# Altium PCB Manchester-Comparator_Module.PcbDoc
Units mm, origin at the board's own origin, x right, y up, seen from the top; angles counter-clockwise.
Board outline 105 x 60 mm, 2 copper layers (Top Layer, Bottom Layer); 23 components, 26 nets, 102 pads, 0 vias.
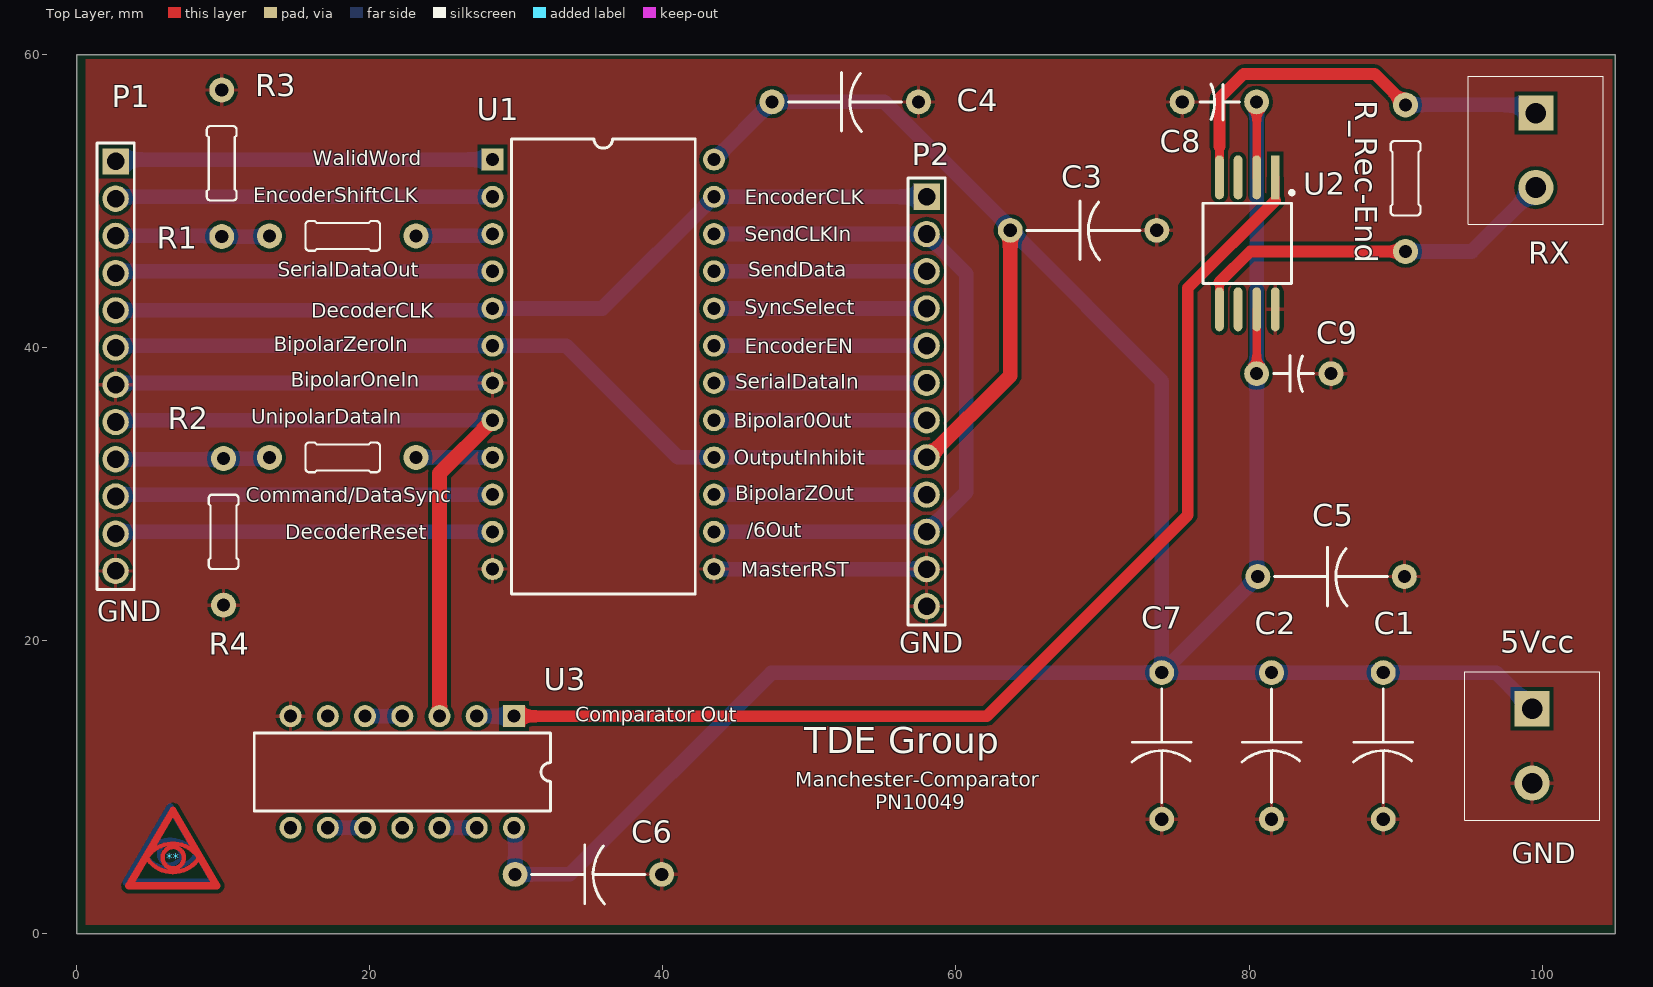
[diagram p0: Top Layer view]
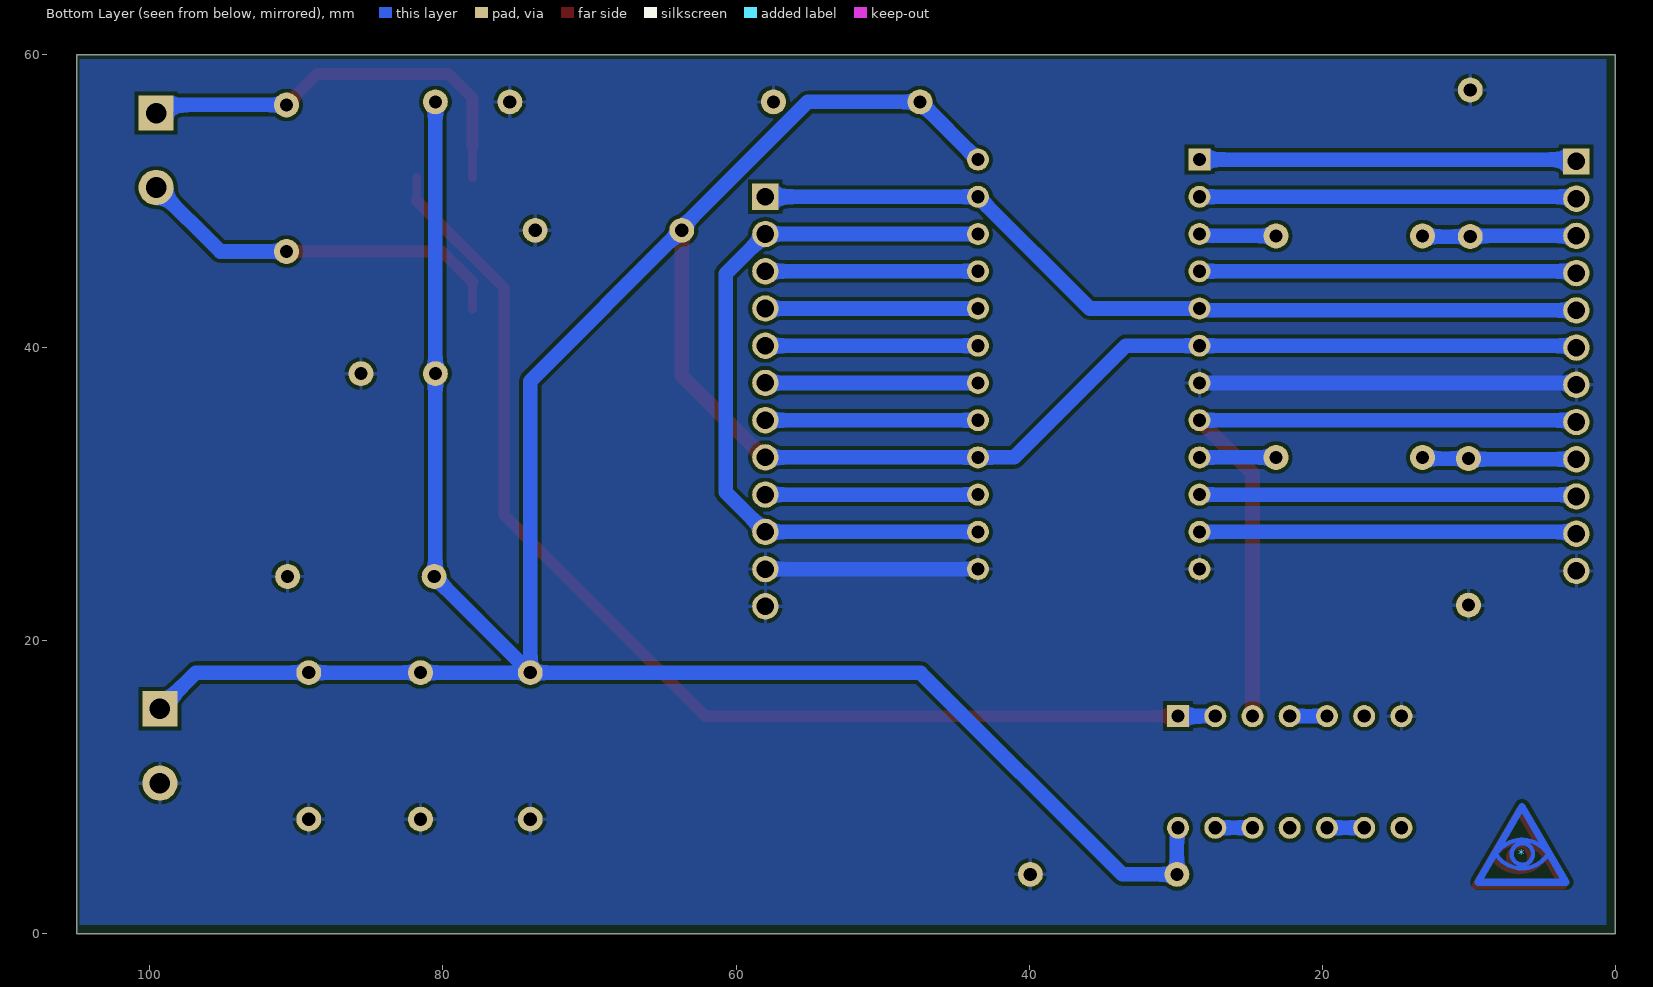
[diagram p1: Bottom Layer view, seen from below]

## Layer stack, top to bottom
Top Solder: solder mask 0.0102, Solder Resist, Dk 3.5
Top Layer: signal copper 0.0356
Dielectric 1: dielectric 0.32, FR-4, Dk 4.8
Bottom Layer: signal copper 0.0356
Bottom Solder: solder mask 0.0102, Solder Resist, Dk 3.5

## Board outline
0,0 0,60 105,60 105,0

## Design rules (kind name [scope] priority, off if disabled: settings)
Clearance Polygons [InPolygon] p1: gap=0.254
Clearance [All] p2: gap=0.15
MinimumSolderMaskSliver [All] p1: minsoldermaskwidth=0.1
PolygonConnect [All] p1: connectstyle=Relief reliefconductorwidth=0.254 reliefentries=4 polygonreliefangle="90 Angle" airgapwidth=0.254
RoomDefinition Manchester-Comparator_Module [InComponentClass('Manchester-Comparator_Module')] p1: confinementstyle=ConfineIn formatcopy=TRUE lockcomponents=FALSE outline -3.683,-6.35 111.887,-6.35 111.887,62.865 -3.683,62.865
RoutingVias [All] p1: holewidth=0.711 width=1.27 viastyle="Through Hole" minholewidth=0 minwidth=0 maxholewidth=0.711 maxwidth=1.27
SilkToSilkClearance [All] p1: silktosilkclearance=0
SilkToSolderMaskClearance [IsPad] p1: minsilkscreentomaskgap=0.1 clearancetoexposedcopper=TRUE
SolderMaskExpansion [All] p1: expansion=0.102
Width [All] p1: maxlimit=4 minlimit=0.254 preferedwidth=0.5
27 further rules are at their usual default settings.

## Components (designator, comment, footprint, x,y, rotation, side; value= is the part's Value field where it differs from the comment)
5Vcc "PHOENIX_1715721" Phoenix-2-5_08 99.314,12.827 r270 top
* "Eye" Eye 6.35,5.461 r180 bottom
** "Eye" Eye 6.604,5.207 r0 top
C1 "Capacitor-Dummy-THT" Dummy-10mm 89.154,12.827 r270 top
C2 "Capacitor-Dummy-THT" Dummy-10mm 81.534,12.827 r270 top
C3 "Capacitor-Dummy-THT" Dummy-10mm 68.707,48.006 r0 top
C4 "Capacitor-Dummy-THT" Dummy-10mm 52.451,56.769 r0 top
C5 "Capacitor-Dummy-THT" Dummy-10mm 85.598,24.384 r0 top
C6 "Capacitor-Dummy-THT" Dummy-10mm 34.925,4.064 r0 top
C7 "Capacitor-Dummy-THT" Dummy-10mm 74.041,12.827 r270 top
C8 "100nF_50V_THT_HT" KEMET-C052H 77.978,56.769 r180 top
C9 "100nF_50V_THT_HT" KEMET-C052H 83.058,38.227 r0 top
P1 "Plug_12_2.54" HDR1X12_2.54 2.667,38.735 r270 top
P2 "Plug_12_2.54" HDR1X12_2.54 58,36.322 r270 top
R1 "10k_10mm-HT" Dummy-10mm 18.161,47.625 r180 top
R2 "10k_10mm-HT" Dummy-10mm 18.161,32.512 r180 top
R3 "20k_10mm-HT" Dummy-10mm 9.906,52.578 r270 top
R4 "20k_10mm-HT" Dummy-10mm 10.033,27.432 r90 top
R_Rec-End "Resistor-Dummy-THT" Dummy-10mm 90.678,51.562 r90 top
RX "PHOENIX_1715721" Phoenix-2-5_08 99.568,53.467 r270 top
U1 "HI15530CD" DIP-24-Ceramic-HT 35.941,38.862 r270 top
U2 "HMXCMP01DEN" Honeywell-SO8 79.883,47.117 r180 top
U3 "SN7400N" DIP-14 22.225,11.049 r180 top

## Footprints (in the part's own frame and the unit in brackets; to place one, negate y for a bottom-side part, rotate by r counter-clockwise, add the part's x,y. Pads: shape width x height; smd on the part's side, far side on the other; paste and mask are expansions set on the pad)
DIP-14 [mm] "DIP; 14 Leads; Row Spacing 7.62 mm; Pitch 2.54 mm"
  rect 1.5x1.5 hole 0.9: 1(-7.62,-3.81)
  round 1.5 hole 0.9: 2(-5.08,-3.81) 3(-2.54,-3.81) 4(0,-3.81) 5(2.54,-3.81) 6(5.08,-3.81) 7(7.62,-3.81) 8(7.62,3.81) 9(5.08,3.81) 10(2.54,3.81) 11(0,3.81) 12(-2.54,3.81) 13(-5.08,3.81) 14(-7.62,3.81)
  silkscreen extent -10.1,-2.65 10.1,2.65, body extent -10.02,-2.6 10.09,2.7, height 3
DIP-24-Ceramic-HT [mm] "DIP; 24 Leads; Row Spacing 7.62 mm; Pitch 2.54 mm"
  rect 1.5x1.5 hole 0.9: 1(-13.97,-7.555)
  round 1.5 hole 0.9: 2(-11.43,-7.555) 3(-8.89,-7.555) 4(-6.35,-7.555) 5(-3.81,-7.555) 6(-1.27,-7.555) 7(1.27,-7.555) 8(3.81,-7.555) 9(6.35,-7.555) 10(8.89,-7.555) 11(11.43,-7.555) 12(13.97,-7.555) 13(13.97,7.555) 14(11.43,7.555) 15(8.89,7.555) 16(6.35,7.555) 17(3.81,7.555) 18(1.27,7.555) 19(-1.27,7.555) 20(-3.81,7.555) 21(-6.35,7.555) 22(-8.89,7.555) 23(-11.43,7.555) 24(-13.97,7.555)
  silkscreen extent -15.38,-6.27 15.68,6.28, body extent -15.38,-6.27 15.7,6.28, height 3
Dummy-10mm [mm] "Dummy-10mm"
  round 1.7 hole 0.9: 1(-5,0) 2(5,0)
  silkscreen extent -3.88,-2.01 3.85,2, body extent -2.39,-0.88 2.41,0.88, height 1.87
Eye [mm]
  Top Layer circle w0.3: c-0.005,-0.005 r0.728
  Top Layer lines w0.3: 1.792,0.042 cw(c-0.03,1.138) -1.862,0.058 ; 1.74,0.007 ccw(c-0.03,-1.17) -1.796,0.014
  Top Layer lines w0.5: 2.97,-1.93 -0.025,3.225 -3.03,-1.93 2.97,-1.93
HDR1X12_2.54 [mm] "Connector; Header; 11 Position"
  rect 1.8x1.8 hole 1.2: 1(-13.97,0)
  round 1.8 hole 1.2: 2(-11.43,0) 3(-8.89,0) 4(-6.35,0) 5(-3.81,0) 6(-1.27,0) 7(1.27,0) 8(3.81,0) 9(6.35,0) 10(8.89,0) 11(11.43,0) 12(13.97,0)
  silkscreen extent -15.24,-1.27 15.24,1.27, body extent -15.21,-1.27 15.27,1.27, height 8.62
Honeywell-SO8 [mm] "Honeywell-SO8"
  rect 0.6x3 smd: 1(-1.905,-4.5)
  oval 0.6x3 smd: 2(-0.635,-4.5) 3(0.635,-4.5) 4(1.905,-4.5) 5(1.905,4.5) 6(0.635,4.5) 7(-0.635,4.5) 8(-1.905,4.5)
  silkscreen extent -3.16,-3.58 3.02,2.75, body extent -3.04,-3.2 3,3.21, height 3
KEMET-C052H [mm] "KEMET, C052H/C062 Series, THT"
  round 1.7 hole 0.9: 1(-2.54,0) 2(2.54,0)
  silkscreen extent -1.38,-1.21 1.33,1.22, body extent -3.7,-1.33 3.7,1.3, height 8
Phoenix-2-5_08 [mm] "Phoenix, 1715721"
  rect 2.4x2.4 hole 1.4: 1(-2.54,0)
  round 2.4 hole 1.4: 2(2.54,0)
  silkscreen extent -5.06,-4.6 5.06,4.6, body extent -5.05,-5.19 5.85,4.61, height 14.2

## Part data
5Vcc RX: library part 2Pol_1715721, "Phoenix, 2 pol, 5.08mm, 22A, 715721"
C8 C9: "High Temp C series, NP0, 10%, 50V"
P1 P2: "Plug, 11-Pin"
R1 R2 R3 R4: "RN60 Series, 1%, 175°C"
U1: "Manchester Encoder / Decoder"
U2: "HiTemp Comparator"
U3: "Quad NAND, TTL"

## Nets (pads, with @x,y where several pads share a name; then routed paths per layer and width w, separated by ;. In a path a pad name is that pad's centre, name@x,y a point inside that pad or via, vN(x,y) a via of type N, cw(c..) or ccw(c..) an arc to the next point about the centre after c; other vN are vias at no path point)
5V: 5Vcc.1 C1.1 C2.1 C3.1 C4.1 C5.1 C6.1 C7.1 C8.1 C9.1 P1.6 P2.8 U1.6 U1.16 U1.24 U2.2 U2.7 U3.14 | length 267
  Top Layer w0.6: C9.1 U2.7 ; U2.2 C8.1
  Top Layer w1: P2.8@58.127,32.512 63.707,38.092 C3.1@63.707,48.18
  Bottom Layer w0.6: U3.14 U3.14@29.925,7.159
  Bottom Layer w1: P1.6 2.794,40.132 U1.6 33.401,40.132 41.021,32.512 U1.16 P2.8@58.127,32.512 ; U3.14@29.925,7.159 C6.1 33.655,4.064 47.418,17.827 C7.1 ; U1.24 43.514,52.832 C4.1 55.118,56.769 C3.1@63.707,48.18 ; C3.1@63.73,48.03 74.041,37.719 C7.1 ; C8.1 C9.1 80.518,24.304 C7.1 ; 5Vcc.1 96.854,17.827 C1.1 C2.1 C7.1
GND: 5Vcc.2 C1.2 C2.2 C3.2 C4.2 C5.2 C6.2 C7.2 C8.2 C9.2 P1.7 P1.12 P2.11 P2.12 R3.1 R4.1 U1.7 U1.12 U1.13 U2.8 U3.7 | length 40.3
  Bottom Layer w1: P1.7 2.794,37.592 U1.7 ; U1.13 P2.11
NetP1_1: P1.1 U1.1 | length 25.6
  Bottom Layer w1: P1.1@2.794,52.832 U1.1
NetP1_2: P1.2 U1.2 | length 25.6
  Bottom Layer w1: P1.2@2.794,50.292 U1.2
NetP1_3: P1.3 R1.2 R3.2 | length 10.5
  Bottom Layer w1: P1.3 R3.2@9.906,47.625 ; R3.2 13.114,47.578 R1.2
NetP1_4: P1.4 U1.4 | length 25.6
  Bottom Layer w1: P1.4@2.794,45.212 U1.4
NetP1_5: P1.5 P2.1 U1.5 U1.23 | length 58.5
  Bottom Layer w1: P1.5 28.259,42.545 U1.5 35.876,42.672 U1.23 P2.1
NetP1_8: P1.8 U1.8 U3.3 | length 47.3
  Top Layer w1: U3.3 24.765,31.431 U1.8
  Bottom Layer w1: P1.8@2.794,35.052 U1.8
NetP1_9: P1.9 R2.2 R4.2 | length 10.5
  Bottom Layer w1: P1.9 R4.2@10.033,32.385 ; R4.2 13.081,32.432 R2.2
NetP1_10: P1.10 U1.10 | length 25.6
  Bottom Layer w1: P1.10@2.794,29.972 U1.10
NetP1_11: P1.11 U1.11 | length 25.6
  Bottom Layer w1: P1.11@2.794,27.432 U1.11
NetP2_2: P2.2 P2.10 U1.14 U1.22 | length 51.6
  Bottom Layer w1: U1.14 P2.10 60.706,30.138 60.706,45.046 P2.2 U1.22
NetP2_3: P2.3 U1.21 | length 14.5
  Bottom Layer w1: U1.21 P2.3
NetP2_4: P2.4 U1.20 | length 14.5
  Bottom Layer w1: U1.20 P2.4
NetP2_5: P2.5 U1.19 | length 14.5
  Bottom Layer w1: U1.19 P2.5
NetP2_6: P2.6 U1.18 | length 14.5
  Bottom Layer w1: U1.18 P2.6
NetP2_7: P2.7 U1.17 | length 14.5
  Bottom Layer w1: U1.17 P2.7
NetP2_9: P2.9 U1.15 | length 14.5
  Bottom Layer w1: U1.15 P2.9@58.039,29.972
NetR1_1: R1.1 U1.3 | length 5.3
  Bottom Layer w1: R1.1 28.259,47.625 U1.3
NetR2_1: R2.1 U1.9 | length 5.2
  Bottom Layer w1: R2.1 U1.9
NetR_Rec-End_1: R_Rec-End.1 RX.2 U2.5 | length 26.1
  Top Layer w0.6: U2.5 77.978,44.45
  Top Layer w0.8: 77.978,44.45 80.09,46.562 R_Rec-End.1
  Bottom Layer w1: R_Rec-End.1 95.203,46.562 RX.2
NetR_Rec-End_2: R_Rec-End.2 RX.1 U2.4 | length 28.8
  Top Layer w0.6: U2.4 77.978,53.721
  Top Layer w0.8: 77.978,53.721 77.978,57.023 79.629,58.674 88.566,58.674 R_Rec-End.2
  Bottom Layer w1: R_Rec-End.2 99.013,56.562 RX.1
NetU2_1: U2.1 U3.1 U3.2 | length 79.7
  Top Layer w0.6: 81.788,50.038 U2.1
  Top Layer w0.8: U3.1 62.103,14.859 75.819,28.575 75.819,44.069 81.788,50.038
  Bottom Layer w1: U3.2 U3.1
NetU3_4: U3.4 U3.5 | length 2.5
  Bottom Layer w1: U3.5 U3.4
NetU3_9: U3.9 U3.10 | length 2.5
  Bottom Layer w1: U3.9 U3.10
NetU3_12: U3.12 U3.13 | length 2.5
  Bottom Layer w1: U3.12 U3.13
pads on no net: U2.3 U2.6 U3.6 U3.8 U3.11

## Polygon pours and split planes (outlines as drawn)
GND on Top Layer "GND" (solid, pour order 0): 0.635,0.635 0.635,59.69 104.775,59.69 104.775,0.635
GND on Bottom Layer "GND-1" (solid, pour order 2): 0.635,0.635 0.635,59.69 104.775,59.69 104.775,0.635

## Silkscreen, mask and mechanical layers (free items; w line width, h text height)
Top Overlay:
  text "WalidWord" at 16.129,52.451 h1
  text "EncoderShiftCLK" at 12.065,49.911 h1
  text "EncoderCLK" at 45.593,49.784 h1
  text "SendCLKIn" at 45.593,47.244 h1
  text "SerialDataOut" at 13.716,44.831 h1
  text "SendData" at 45.847,44.831 h1
  text "SyncSelect" at 45.593,42.291 h1
  text "DecoderCLK" at 16.002,42.037 h1
  text "BipolarZeroIn" at 13.462,39.751 h1
  text "EncoderEN" at 45.593,39.624 h1
  text "BipolarOneIn" at 14.605,37.338 h1
  text "SerialDataIn" at 44.958,37.211 h1
  text "UnipolarDataIn" at 11.938,34.798 h1
  text "Bipolar0Out" at 44.831,34.544 h1
  text "OutputInhibit" at 44.831,32.004 h1
  text "BipolarZOut" at 44.958,29.591 h1
  text "Command/DataSync" at 11.557,29.464 h1
  text "/6Out" at 45.72,27.051 h1
  text "DecoderReset" at 14.224,26.924 h1
  text "MasterRST" at 45.339,24.384 h1
  text "GND" at 1.397,21.336 h1.4
  text "GND" at 56.134,19.177 h1.4
  text "Comparator Out" at 34.036,14.478 h1
  text "TDE Group" at 49.657,12.319 h1.8
  text "Manchester-Comparator" at 49.022,10.033 h1
  text "PN10049" at 54.483,8.509 h1
  text "GND" at 97.917,4.826 h1.4
Outline:
  the board outline again, w0.1

## Dimensions
105,0 to 0,0 on Mechanical 16
105,0 to 105,60 on Mechanical 16